# Altium PCB Main.PcbDoc
Units mm, origin at the board's own origin, x right, y up, seen from the top; angles counter-clockwise.
Board outline 197.87 x 96.77 mm, 2 copper layers (Top Layer, Bottom Layer); 50 components, 60 nets, 201 pads, 10 vias.
Unrouted connection lines stored in the file: 1.
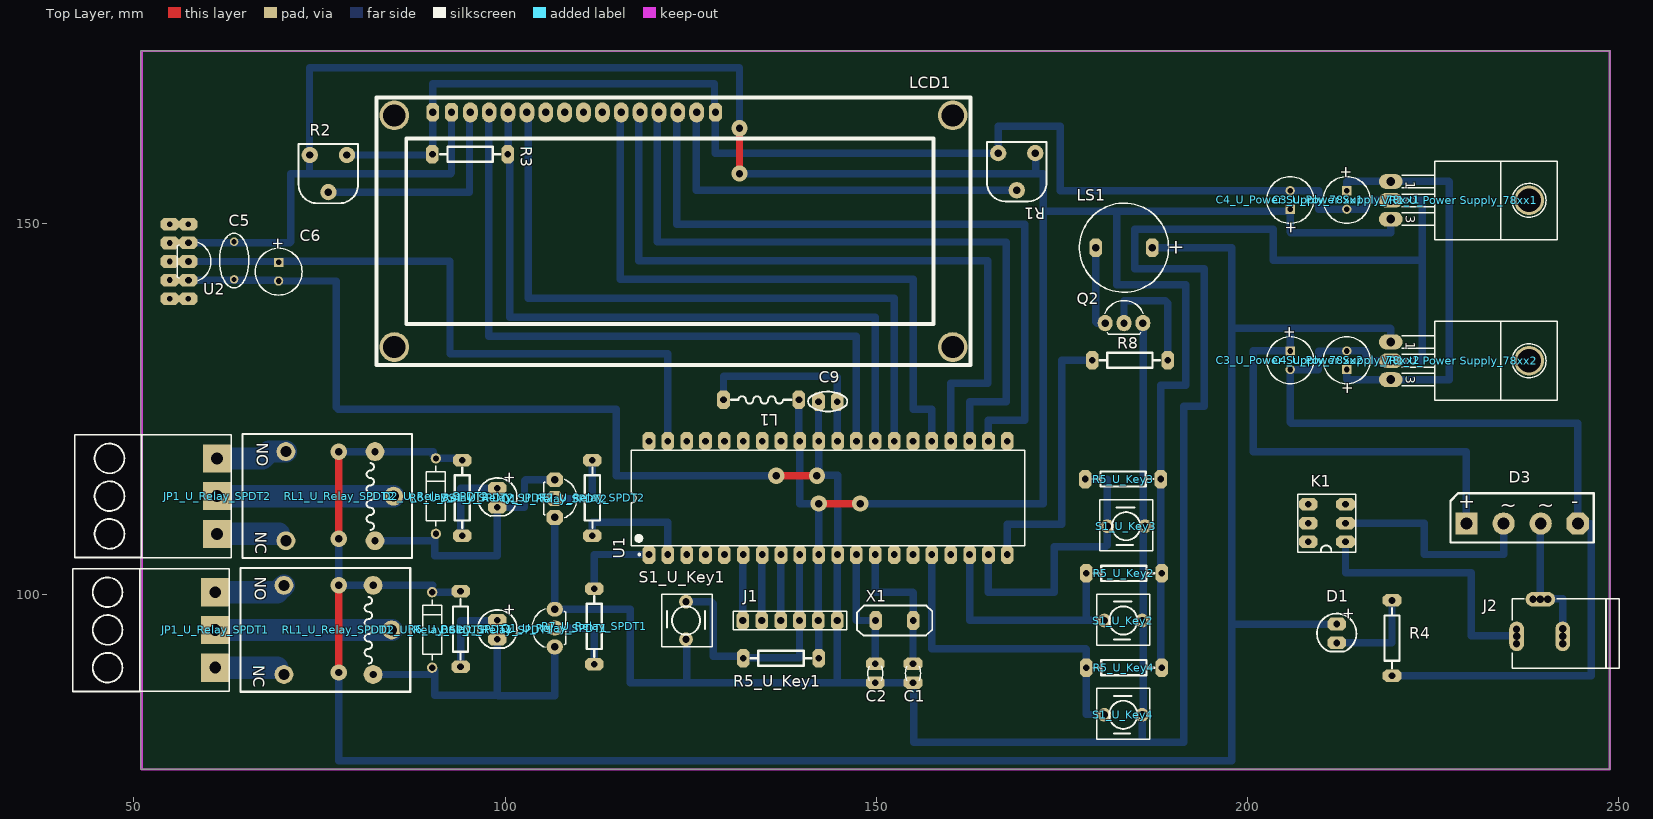
[diagram p0: Top Layer view]
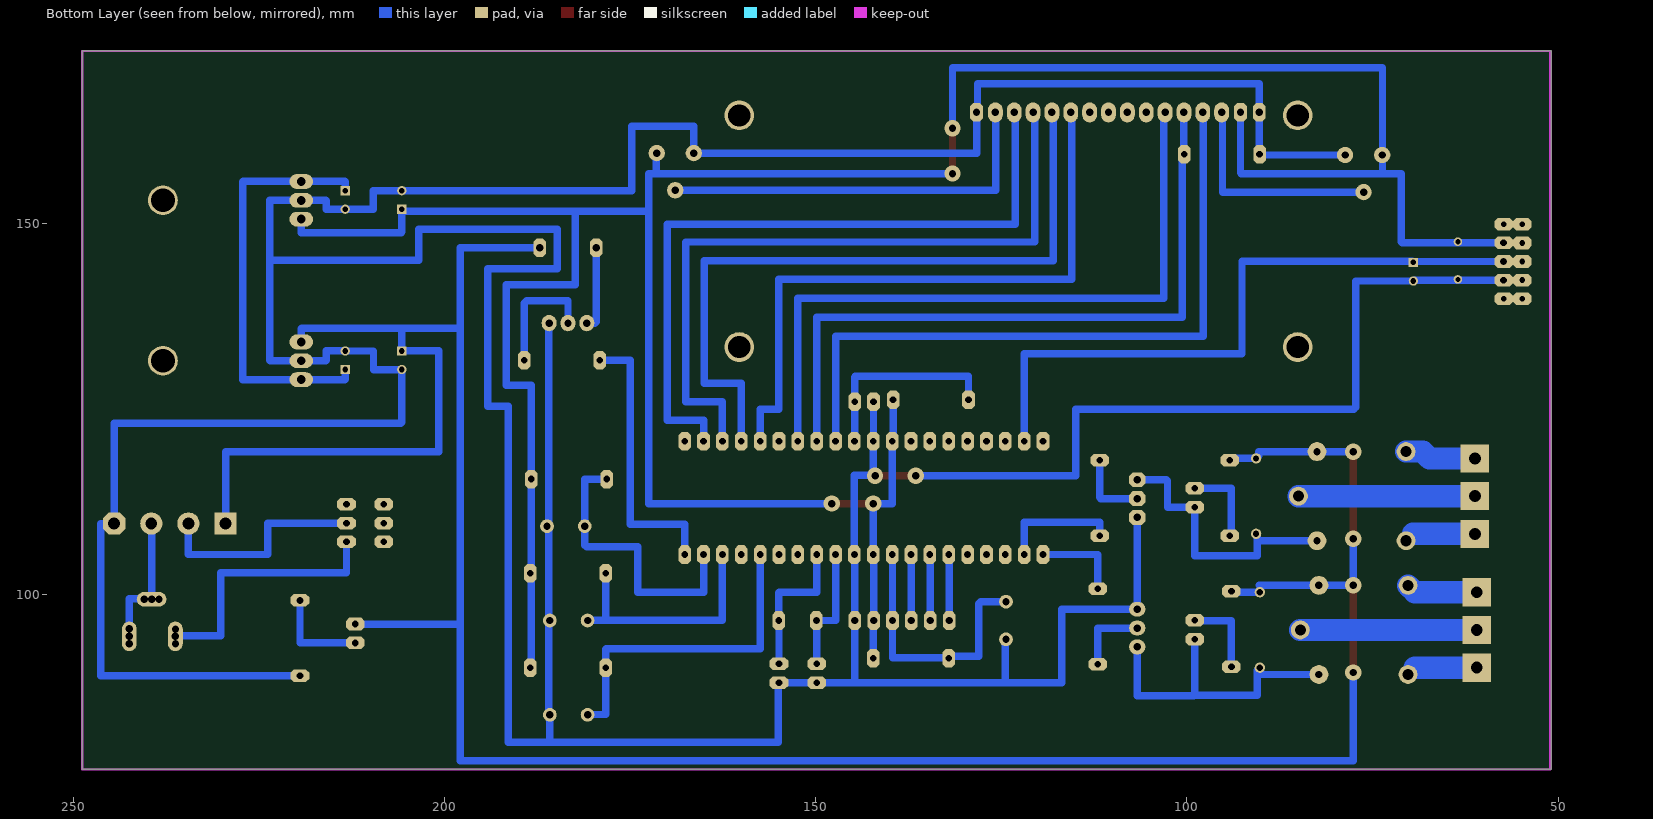
[diagram p1: Bottom Layer view, seen from below]
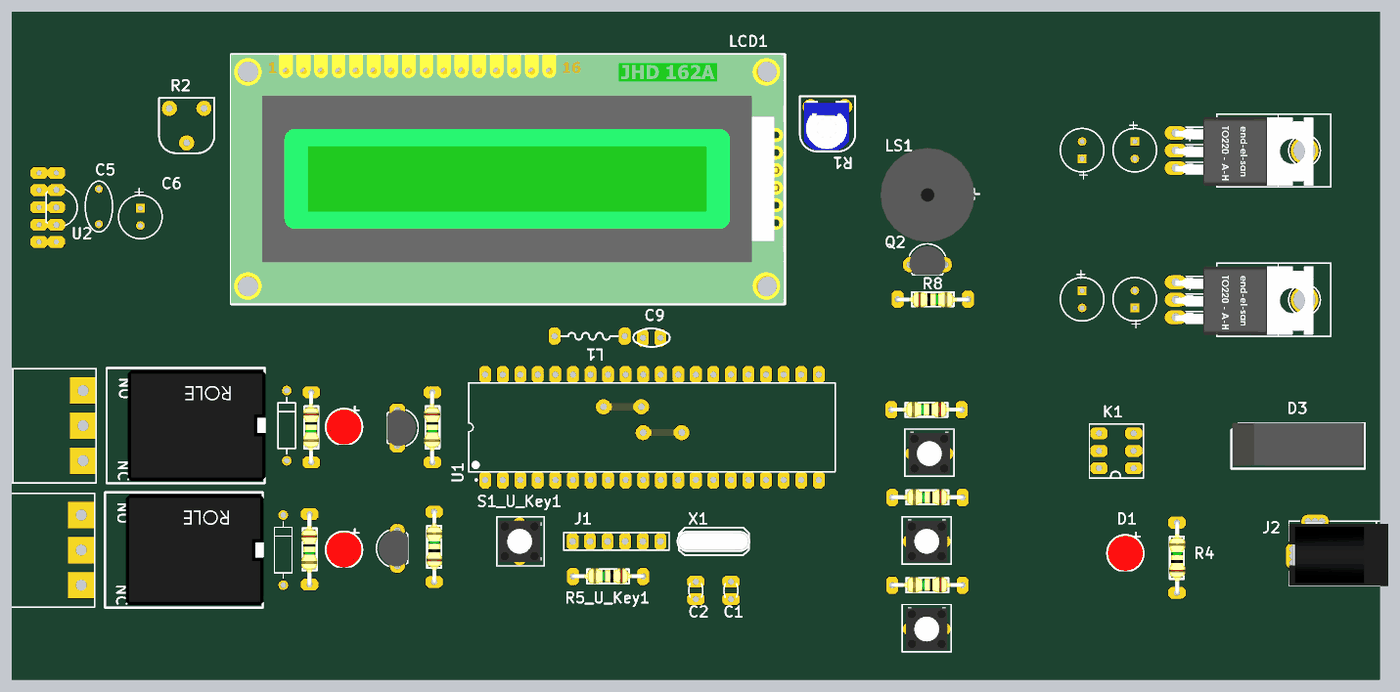
[diagram p2: 3D render of the assembled board from above, using the file's embedded part models]

## Layer stack, top to bottom
Top Solder: solder mask 0.0102, Solder Resist, Dk 3.5
Top Layer: signal copper 0.0356
Dielectric 1: dielectric 0.32, FR-4, Dk 4.8
Bottom Layer: signal copper 0.0356
Bottom Solder: solder mask 0.0102, Solder Resist, Dk 3.5

## Board outline
50.927,76.454 248.793,76.454 248.793,173.228 50.927,173.228

## Design rules (kind name [scope] priority, off if disabled: settings)
Clearance [All] p1: gap=0.5
Height [All] p1: minheight=0 maxheight=30 prefheight=12.7
PolygonConnect [All] p1: connectstyle=Relief reliefconductorwidth=0.254 reliefentries=4 polygonreliefangle="90 Angle" airgapwidth=0.254
RoomDefinition "U_Display_LED_Anode Command" [InComponentClass('U_Display_LED_Anode Command')] p1: confinementstyle=ConfineIn formatcopy=TRUE lockcomponents=FALSE outline 0,0 50.8,0 50.8,25.4 0,25.4
RoomDefinition U_Voltage_Bridge [InComponentClass('U_Voltage_Bridge')] p2: confinementstyle=ConfineIn formatcopy=TRUE lockcomponents=FALSE outline 0,0 50.8,0 50.8,25.4 0,25.4
RoomDefinition "U_Programer Connectors_SPI" [InComponentClass('U_Programer Connectors_SPI')] p3: confinementstyle=ConfineIn formatcopy=TRUE lockcomponents=FALSE outline 0,0 50.8,0 50.8,25.4 0,25.4
RoomDefinition U_Oscillator_11 [InComponentClass('U_Oscillator_11')] p4: confinementstyle=ConfineIn formatcopy=TRUE lockcomponents=FALSE outline 0,0 50.8,0 50.8,25.4 0,25.4
RoomDefinition U_Sensor_LM35 [InComponentClass('U_Sensor_LM35')] p5: confinementstyle=ConfineIn formatcopy=TRUE lockcomponents=FALSE outline 51.85,175.37 74.35,175.37 74.35,190.37 51.85,190.37
RoomDefinition U_Relay_SPDT2 [InComponentClass('U_Relay_SPDT2')] p6: confinementstyle=ConfineIn formatcopy=TRUE lockcomponents=FALSE outline 52.07,40.55 115.47,40.55 115.47,69.595 52.07,69.595
RoomDefinition U_AVCC [InComponentClass('U_AVCC')] p7: confinementstyle=ConfineIn formatcopy=TRUE lockcomponents=FALSE outline 143.51,60.96 134.62,60.96 134.62,44.45 143.51,44.45
RoomDefinition U_Relay_SPDT1 [InComponentClass('U_Relay_SPDT1')] p8: confinementstyle=ConfineIn formatcopy=TRUE lockcomponents=FALSE outline 53.34,10.16 116.84,10.16 116.84,38.354 53.34,38.354
RoomDefinition "U_Power Supply_78xx2" [InComponentClass('U_Power Supply_78xx2')] p9: confinementstyle=ConfineIn formatcopy=TRUE lockcomponents=FALSE outline 271.78,123.882 318.77,123.882 318.77,139.122 271.78,139.122
RoomDefinition "U_Power Supply_78xx1" [InComponentClass('U_Power Supply_78xx1')] p10: confinementstyle=ConfineIn formatcopy=TRUE lockcomponents=FALSE outline 271.78,142.952 318.77,142.952 318.77,157.176 271.78,157.176
RoomDefinition U_Key4 [InComponentClass('U_Key4')] p11: confinementstyle=ConfineIn formatcopy=TRUE lockcomponents=FALSE outline 228.6,12.7 259.08,12.7 259.08,27.94 228.6,27.94
RoomDefinition U_Key3 [InComponentClass('U_Key3')] p12: confinementstyle=ConfineIn formatcopy=TRUE lockcomponents=FALSE outline 228.6,49.53 256.54,49.53 256.54,66.04 228.6,66.04
RoomDefinition U_Key2 [InComponentClass('U_Key2')] p13: confinementstyle=ConfineIn formatcopy=TRUE lockcomponents=FALSE outline 228.6,30.48 257.81,30.48 257.81,46.99 228.6,46.99
RoomDefinition U_Key1 [InComponentClass('U_Key1')] p14: confinementstyle=ConfineIn formatcopy=TRUE lockcomponents=FALSE outline 131.445,13.97 163.195,13.97 163.195,34.29 131.445,34.29
RoomDefinition Sounder_Buzzer [InComponentClass('Sounder_Buzzer')] p15: confinementstyle=ConfineIn formatcopy=TRUE lockcomponents=FALSE outline 168.283,188.647 188.603,188.647 188.603,217.857 168.283,217.857
RoomDefinition Display_LCD16x2 [InComponentClass('Display_LCD16x2')] p16: confinementstyle=ConfineIn formatcopy=TRUE lockcomponents=FALSE outline 52.713,188.647 158.123,188.647 158.123,230.557 52.713,230.557
RoomDefinition ATmega16 [InComponentClass('ATmega16')] p17: confinementstyle=ConfineIn formatcopy=TRUE lockcomponents=FALSE outline 153.035,40.64 215.265,40.64 215.265,63.5 153.035,63.5
RoutingCorners [All] p1: cornerstyle=90-Degree minsetback=2.54 maxsetback=2.54
RoutingVias [All] p1: holewidth=0.8 width=1.6 viastyle="Through Hole" minholewidth=0.711 minwidth=1.27 maxholewidth=0.711 maxwidth=1.27
SolderMaskExpansion [All] p1: expansion=0.102
Width Width_1 [(InNet('NetJP1_U_Relay_SPDT1_1') OR InNet('NetJP1_U_Relay_SPDT1_2') OR InNet('NetJP1_U_Relay_SPDT1_3') OR InNet('NetJP1_U_Relay_SPDT2_1') OR InNet('NetJP1_U_Relay_SPDT2_2') OR InNet('NetJP1_U_Relay_SPDT2_3'))] p1: maxlimit=3 minlimit=3 preferedwidth=3
Width [All] p2: maxlimit=1 minlimit=1 preferedwidth=1
28 further rules are at their usual default settings.

## Classes and differential pairs
component class U_Sensor_LM35: C5 C6 U2
component class U_AVCC: C9 L1
component class ATmega16: U1
component class Display_LCD16x2: LCD1 R1 R2 R3
component class U_Oscillator_11: C1 C2 X1
component class U_Voltage_Bridge: D3 J2 K1
component class Sounder_Buzzer: LS1 Q2 R8
component class "U_Programer Connectors_SPI": J1
component class U_Key1: R5_U_Key1 S1_U_Key1
component class U_Key2: R5_U_Key2 S1_U_Key2
component class U_Key3: R5_U_Key3 S1_U_Key3
component class U_Key4: R5_U_Key4 S1_U_Key4
component class "U_Display_LED_Anode Command": D1 R4
component class "U_Power Supply_78xx1": "C3_U_Power Supply_78xx1" "C4_U_Power Supply_78xx1" "VR1_U_Power Supply_78xx1"
component class "U_Power Supply_78xx2": "C3_U_Power Supply_78xx2" "C4_U_Power Supply_78xx2" "VR1_U_Power Supply_78xx2"
component class U_Relay_SPDT1: D2_U_Relay_SPDT1 DS1_U_Relay_SPDT1 JP1_U_Relay_SPDT1 Q1_U_Relay_SPDT1 R6_U_Relay_SPDT1 R7_U_Relay_SPDT1 RL1_U_Relay_SPDT1
component class U_Relay_SPDT2: D2_U_Relay_SPDT2 DS1_U_Relay_SPDT2 JP1_U_Relay_SPDT2 Q1_U_Relay_SPDT2 R6_U_Relay_SPDT2 R7_U_Relay_SPDT2 RL1_U_Relay_SPDT2
channel class Key_Pull-Up: U_Key1 U_Key2 U_Key3 U_Key4
channel class Relay_SPDT: U_Relay_SPDT1 U_Relay_SPDT2
channel class "Voltage_Regulators_78xx_Figure 1": "U_Power Supply_78xx1" "U_Power Supply_78xx2"

## Components (designator, comment, footprint, x,y, rotation, side; value= is the part's Value field where it differs from the comment)
C1 "Cap" CAPNTO2.54-3.56x2.03 154.94,89.408 r90 top
C2 "Cap" CAPNTO2.54-3.56x2.03 149.86,89.408 r90 top
"C3_U_Power Supply_78xx1" "Cap Pol1" CAPPR2.5-6.3x5 213.36,153.162 r270 top (schematic designator C3)
"C3_U_Power Supply_78xx2" "Cap Pol1" CAPPR2.5-6.3x5 205.74,131.572 r270 top (schematic designator C3)
"C4_U_Power Supply_78xx1" "Cap Pol1" CAPPR2.5-6.3x5 205.74,153.162 r90 top (schematic designator C4)
"C4_U_Power Supply_78xx2" "Cap Pol1" CAPPR2.5-6.3x5 213.36,131.572 r90 top (schematic designator C4)
C5 "Cap" CAPNTO5.08-7.37x3.94 63.5,145 r90 top
C6 "Cap Pol1" CAPPR2.5-6.3x5 69.5,143.5 r270 top
C9 "Capacitor_2" RAD_2.54mm 143.51,125.984 r0 top
D1 "LED" LED-5mm_Red 212.09,94.742 r270 top
D2_U_Relay_SPDT1 "Diode" DIODE-0.4 90.17,95.25 r90 top (schematic designator D2)
D2_U_Relay_SPDT2 "Diode" DIODE-0.4 90.684,113.27 r90 top (schematic designator D2)
D3 "Bridge1" BRIDGE-2 236.979,109.582 r0 top
DS1_U_Relay_SPDT1 "LED" LED-5mm_Red 99.06,95.25 r270 top (schematic designator DS1)
DS1_U_Relay_SPDT2 "LED" LED-5mm_Red 99.06,113.03 r270 top (schematic designator DS1)
J1 "Connector_6pin" HDR1X6 138.43,96.52 r0 top
J2 "Power Jack" KLD-0202 242.44,94.382 r180 top
JP1_U_Relay_SPDT1 "Header 3" Fonics_3C 60.96,95.25 r270 top (schematic designator JP1)
JP1_U_Relay_SPDT2 "Header 3" Fonics_3C 61.22,113.27 r270 top (schematic designator JP1)
K1 "SW DPDT_2" DPDT-6_2 210.69,109.622 r270 top
L1 "Inductor" Inductor_Axial 134.874,126.238 r180 top
LCD1 "LCD_16*2" LCD_2x16 122.69,149.15 r0 top
LS1 "Buzzer" BUZZER 183.359,146.737 r180 top
Q1_U_Relay_SPDT1 "BC337" TO92C#1 106.68,95.504 r180 top (schematic designator Q1)
Q1_U_Relay_SPDT2 "BC337" TO92C#2 106.68,112.94 r0 top (schematic designator Q1)
Q2 "NPN" TO92C#1 183.359,136.577 r90 top
R1 "RPot1" VR8-5/5.6MM 168.91,156.972 r180 top
R2 "RPot1" VR8-5/5.6MM 76.2,156.718 r180 top
R3 "Res1" AXIAL-0.4 94.115,159.31 r0 top
R4 "Res1" AXIAL-0.4 219.456,92.964 r90 top
R5_U_Key1 "Res1" AXIAL-0.4 138.34,91.44 r180 top (schematic designator R5)
R5_U_Key2 "Res1" AXIAL-0.4 184.531,102.87 r180 top (schematic designator R5)
R5_U_Key3 "Res1" AXIAL-0.4 184.404,115.57 r180 top (schematic designator R5)
R5_U_Key4 "Res1" AXIAL-0.4 184.531,90.17 r180 top (schematic designator R5)
R6_U_Relay_SPDT1 "Res1" AXIAL-0.4 94,96.54 r270 top (schematic designator R6)
R6_U_Relay_SPDT2 "Res1" AXIAL-0.4 94.234,114.21 r270 top (schematic designator R6)
R7_U_Relay_SPDT1 "Res1" AXIAL-0.4 112,94.54 r90 top (schematic designator R7)
R7_U_Relay_SPDT2 "Res1" AXIAL-0.4 111.76,114.21 r270 top (schematic designator R7)
R8 "Res1" AXIAL-0.4 182.97,131.572 r0 top
RL1_U_Relay_SPDT1 "Relay-SPDT_2" RELAY-SPDT-1 77.47,95.25 r270 top (schematic designator RL1)
RL1_U_Relay_SPDT2 "Relay-SPDT_2" RELAY-SPDT-1 77.73,113.27 r270 top (schematic designator RL1)
S1_U_Key1 "SW-PB" SPST-2_2 124.37,96.52 r90 top (schematic designator S1)
S1_U_Key2 "SW-PB" SPST-2_2 183.261,96.52 r180 top (schematic designator S1)
S1_U_Key3 "SW-PB" SPST-2_2 183.642,109.22 r180 top (schematic designator S1)
S1_U_Key4 "SW-PB" SPST-2_2 183.261,83.82 r180 top (schematic designator S1)
U1 "ATmega16-16PC" 40P6 143.51,113.03 r90 top
U2 "LM35DZ" TO92C#3 57.35,144.87 r0 top
"VR1_U_Power Supply_78xx1" "Volt Reg" TO257H 228.6,153.112 r270 top (schematic designator VR1)
"VR1_U_Power Supply_78xx2" "Volt Reg" TO257H 228.6,131.502 r270 top (schematic designator VR1)
X1 "XTAL" XTAL_1 152.4,96.52 r0 top

## Footprints (in the part's own frame and the unit in brackets; to place one, negate y for a bottom-side part, rotate by r counter-clockwise, add the part's x,y. Pads: shape width x height; smd on the part's side, far side on the other; paste and mask are expansions set on the pad)
40P6 [mm] "DIP, 40-Leads, Row Spacing 15.24mm, Pitch 2.54mm, Body 52.2x13.95mm"
  oct 2.5x1.7 hole 0.9: 1(-7.62,24.13) 2(-7.62,21.59) 3(-7.62,19.05) 4(-7.62,16.51) 5(-7.62,13.97) 6(-7.62,11.43) 7(-7.62,8.89) 8(-7.62,6.35) 9(-7.62,3.81) 10(-7.62,1.27) 11(-7.62,-1.27) 12(-7.62,-3.81) 13(-7.62,-6.35) 14(-7.62,-8.89) 15(-7.62,-11.43) 16(-7.62,-13.97) 17(-7.62,-16.51) 18(-7.62,-19.05) 19(-7.62,-21.59) 20(-7.62,-24.13) 21(7.62,-24.13) 22(7.62,-21.59) 23(7.62,-19.05) 24(7.62,-16.51) 25(7.62,-13.97) 26(7.62,-11.43) 27(7.62,-8.89) 28(7.62,-6.35) 29(7.62,-3.81) 30(7.62,-1.27) 31(7.62,1.27) 32(7.62,3.81) 33(7.62,6.35) 34(7.62,8.89) 35(7.62,11.43) 36(7.62,13.97) 37(7.62,16.51) 38(7.62,19.05) 39(7.62,21.59) 40(7.62,24.13)
  silkscreen extent -7.74,-26.5 6.45,26.5, body extent -7.05,-26.47 7.05,26.47, height 4.83
AXIAL-0.4 [mm]
  oct 1.7x2.5 hole 0.9: 1(-3.9,0) 2(6.26,0)
  silkscreen extent -2.88,-1.02 5.24,1.02, body extent -4.19,-1.19 6.58,1.12, height 3.51
BRIDGE-2 [mm]
  oct 3x3 hole 1.6: 1(7.5,0)
  round 3 hole 1.6: 2(-2.5,0) 4(2.5,0)
  rect 3x3 hole 1.6: 3(-7.5,0)
  silkscreen extent -9.65,-2.54 9.65,4.06, body extent -9.5,-2.12 9.5,4.13, height 15.75
BUZZER [mm] "created by: M.Hariri (designer)"
  oct 1.7x2.5 hole 1: 1(-3.81,0) 2(3.81,0)
  silkscreen extent -6,-6 6,6, body extent -6.88,-6.78 6.82,6.9, height 9.59
CAPNTO2.54-3.56x2.03 [mm] "Capacitor, Radial, Tantalum, Non-Polarised; Body 3.56 x 2.03 x 5.08 mm (WxTxH max); Pin Spacing 2.54 mm (typ)"
  oct 1.7x2.5 hole 0.9: 1(-1.27,0) 2(1.27,0)
  silkscreen extent -0.98,-1.02 0.98,1.02
CAPNTO5.08-7.37x3.94 [mm] "Capacitor, Radial, Tantalum, Non-Polarised; Body 7.37 x 3.94 x 6.86 mm (WxTxH max); Pin Spacing 5.08 mm (typ)"
  round 1.15 hole 0.7: 1(-2.54,0) 2(2.54,0)
  silkscreen extent -3.68,-1.98 3.68,1.96
CAPPR2.5-6.3x5 [mm] "Capacitor, Electrolytic, Radial; Body 6.3 x 5 mm (Dia.xH typ); Pin Spacing 2.5 mm (typ)"
  rect 1.25x1.25 hole 0.75: 1(-1.25,0)
  round 1.25 hole 0.75: 2(1.25,0)
  silkscreen extent -3.15,-3.15 3.15,3.15
DIODE-0.4 [mm]
  round 1.4 hole 0.85: 1(-5.08,0) 2(5.08,0)
  silkscreen extent -4.06,-1.27 4.06,1.27
DPDT-6_2 [mm]
  oct 1.7x2.5 hole 0.9: 1(-2.54,2.5) 2(0,2.5) 3(2.5,2.5) 4(2.5,-2.5) 5(0,-2.5) 6(-2.54,-2.5)
  silkscreen extent -3.9,-3.9 3.94,3.9
Fonics_3C [mm]
  rect 3.8x3.8 hole 1.6: 1(-5.08,0) 2(0,0) 3(5.08,0)
  silkscreen extent -8.24,-19.16 8.29,1.91
HDR1X6 [mm]
  oct 1.7x2.5 hole 1: 1(-6.4,0) 2(-3.86,0) 3(-1.32,0) 4(1.22,0) 5(3.76,0) 6(6.3,0)
  silkscreen extent -7.67,-1.27 7.57,1.27
Inductor_Axial [mm]
  oct 1.7x2.5 hole 0.9: 1(-4.7,0) 2(5.46,0)
  silkscreen extent -3.68,-0.48 4.44,0.51
KLD-0202 [mm]
  oval 2x4 all layers, no hole: 1(6.2,0) 2(0,0)
  round 1.5 hole 1: 1A(6.22,-0.98) 1B(6.2,0) 1C(6.22,1) 2A(0,-1) 2B(0,0.01) 2C(0,1) 3A(2,-5) 3B(3,-5) 3C(4,-5)
  oval 4x2 all layers, no hole: 3(3,-5)
  silkscreen extent -7.59,-5.05 6.78,4.28, body extent -7.59,-5.07 6.81,4.33, height 11.05
LCD_2x16 [mm]
  round 4 hole 3: 0(-37.6,-15.8) 0(-37.6,15.4) 0(37.6,-15.8) 0(37.6,15.4)
  oct 1.7x2.5 hole 1: 1(-32.45,15.8) 2(-29.91,15.8) 16(5.65,15.8)
  oval 2x2.7 hole 1: 3(-27.37,15.8) 4(-24.83,15.8) 5(-22.29,15.8) 6(-19.75,15.8) 7(-17.21,15.8) 8(-14.67,15.8) 9(-12.13,15.8) 10(-9.59,15.8) 11(-7.05,15.8) 12(-4.51,15.8) 13(-1.97,15.8) 14(0.57,15.8) 15(3.11,15.8)
  silkscreen extent -40,-18.2 40,17.8, body extent -40.13,-18.15 39.87,17.85, height 25.6
LED-5mm_Red [mm]
  oct 1.7x2.5 hole 0.9: 1(-1.3,-0.1) 2(1.24,-0.1)
  silkscreen extent -2.71,-2.74 2.43,2.56, body extent -2.6,-2.64 2.48,2.46, height 9.6
RAD_2.54mm [mm]
  oct 1.7x2.5 hole 0.9: 1(-1.3,0) 2(1.24,0)
  silkscreen extent -2.7,-1.31 2.58,1.37
RELAY-SPDT-1 [mm]
  round 2.54 hole 1.5: 1(0,7.25) 2(-6,-7.25) 3(6,-7.25)
  round 2.54 hole 1: 4(-6,4.75) 5(6,4.75)
  silkscreen extent -8.36,-13.09 8.33,9.75, body extent -8.02,-10.1 7.98,9.9, height 15.58
SPST-2_2 [mm]
  round 1.85 hole 1: 1(-2.54,0) 2(2.54,0)
  silkscreen extent -3.56,-3.56 3.56,3.3, body extent -3,-3.2 3,3, height 4.3
TO92C#1 [mm]
  oval 2.2x2 hole 1: 1(0,2.54) 2(0,0) 3(0,-2.54)
  silkscreen extent -1.48,-2.61 3.02,2.61, body extent -1.52,-2.79 2.68,2.79, height 8
TO92C#2 [mm]
  oct 2.2x2 hole 1: 1(0,2.54) 2(0,0) 3(0,-2.54)
  silkscreen extent -1.48,-2.61 3.02,2.61, body extent -1.52,-2.79 2.68,2.79, height 8
TO92C#3 [mm]
  oct 2.5x1.7 hole 0.9: 1(0,2.54) 2(0,0) 3(0,-2.54)
  silkscreen extent -1.48,-2.61 3.02,2.61
TO257H [mm] "created by designer (M.Hariri)"
  round 4 hole 3.2: 0(0,9.313)
  oval 2x3.2 hole 1.2: 1(-2.54,-9.313) 2(0,-9.313) 3(2.54,-9.313)
  silkscreen extent -5.29,-7.83 5.29,13.12, body extent -4.83,-9.6 5.07,10.61, height 4.55
VR8-5/5.6MM [mm]
  round 2.2 hole 1: 1(-2.5,-2.5) 2(2.5,-2.5) 3(0,2.5)
  silkscreen extent -4,-4 4,4, body extent -3.13,-3.35 3.37,3.89, height 7.7
XTAL_1 [mm]
  oct 1.7x2.5 hole 0.9: 1(-2.5,0) 2(2.58,0)
  silkscreen extent -5.02,-2 5.13,2, body extent -5.33,-1.52 5.33,1.52, height 3.39

## Part data
C1 C2 C5 C9: "Capacitor"
"C3_U_Power Supply_78xx1" "C3_U_Power Supply_78xx2" "C4_U_Power Supply_78xx1" "C4_U_Power Supply_78xx2" C6: "Polarized Capacitor (Radial)"
D1 DS1_U_Relay_SPDT1 DS1_U_Relay_SPDT2: "Typical INFRARED GaAs LED"
D2_U_Relay_SPDT1 D2_U_Relay_SPDT2: "Default Diode"
D3: "Full Wave Diode Bridge"
J1: "Header, 6-Pin"
JP1_U_Relay_SPDT1 JP1_U_Relay_SPDT2: "Header, 3-Pin"
K1: "Single-Pole, Double-Throw Switch, Key"
Q1_U_Relay_SPDT1 Q1_U_Relay_SPDT2: library part NPN, "NPN Bipolar Transistor"
Q2: "NPN Bipolar Transistor"
R1 R2: "Potentiometer"
R3 R4 R5_U_Key1 R5_U_Key2 R5_U_Key3 R5_U_Key4 R6_U_Relay_SPDT1 R6_U_Relay_SPDT2 R7_U_Relay_SPDT1 R7_U_Relay_SPDT2 R8: "Resistor"
RL1_U_Relay_SPDT1 RL1_U_Relay_SPDT2: "SPDT Relay"
S1_U_Key1 S1_U_Key2 S1_U_Key3 S1_U_Key4: "Switch"
U1: "8-Bit AVR Microcontroller with 16K Bytes of In-System Programmable Flash Memory"
U2: "Precision Centigrade Temperature Sensor, 3-pin TO-92"
"VR1_U_Power Supply_78xx1" "VR1_U_Power Supply_78xx2": "Voltage Regulator"
X1: "Crystal Oscillator"

## Free pads (board coordinates)
  oct 2.5x1.7 hole 0.762: 0(54.85,147.37) 2(54.85,144.87) 4(54.85,142.37) 5(54.85,139.87) 6(54.85,149.87) 7(57.35,139.87) 8(57.35,149.87)

## Via types
v1: diameter 2.2, hole 1, Top Layer to Bottom Layer, 10 vias

## Nets (pads, with @x,y where several pads share a name; then routed paths per layer and width w, separated by ;. In a path a pad name is that pad's centre, name@x,y a point inside that pad or via, vN(x,y) a via of type N, cw(c..) or ccw(c..) an arc to the next point about the centre after c; other vN are vias at no path point)
ADC0: U1.40
ADC2: U1.38
ADC3: U1.37
ADC4: U1.36
ADC5: U1.35
ADC6: U1.34
ADC7: U1.33
GND: "C3_U_Power Supply_78xx1.2" "C3_U_Power Supply_78xx2.2" "C4_U_Power Supply_78xx1.2" "C4_U_Power Supply_78xx2.2" "VR1_U_Power Supply_78xx1.2" "VR1_U_Power Supply_78xx2.2" C1.1 C2.1 C5.1 C6.2 C9.1 D3.1 J1.6 LCD1.1 LCD1.16 Q1_U_Relay_SPDT1.3 Q1_U_Relay_SPDT2.3 Q2.3 R1.2 R2.1 R3.1 R4.1 S1_U_Key1.1 S1_U_Key2.1 S1_U_Key3.1 S1_U_Key4.1 U1.11 U1.31 U2.3 | length 783
  Top Layer w1: v1(136.5,116) v1(142,116)
  Bottom Layer w1: U2.3 C6.2@69.42,142.33 ; C6.2 77.25,142.25 77.25,125.25 77.5,125 115,125 115,116 v1(136.5,116) ; R2.1 R3.1@90.123,159.218 ; R3.1@90.24,159.335 LCD1.1 90.24,168.84 128.2,168.84 LCD1.16@128.2,165.09 ; Q1_U_Relay_SPDT2.3 Q1_U_Relay_SPDT1.3 116.84,98.044 116.84,88.138 124.46,88.138 ; S1_U_Key1.1@124.46,93.89 124.46,88.138 ; LCD1.16@128.31,164.92 128.31,159.472 R1.2 166.41,163.068 174.772,163.068 174.772,154.412 205.74,154.412 209.57,154.412 209.57,151.912 213.36,151.912 213.38,151.892 215.9,151.892 215.9,153.062 215.95,153.112 219.287,153.112 223.52,153.112 223.52,145.034 ; U1.31@142.21,120.68 C9.1 ; U1.31 142.24,116.078 144.78,116.078 U1.11 ; 144.73,88.188 J1.6 U1.11@144.73,105.36 ; C1.1 C2.1 124.46,88.138 ; C1.1@155.067,88.011 155.067,80.137 185.801,80.137 ; S1_U_Key4.1 185.801,80.137 ; S1_U_Key4.1@185.936,83.82 Q2.3@185.936,136.577 ; 205.74,130.322 205.74,123.19 205.871,123.059 244.479,123.059 D3.1 246.272,109.582 246.29,109.564 246.29,89.064 R4.1 ; 205.76,130.302 209.55,130.302 209.55,132.802 209.57,132.822 213.36,132.822 ; 213.38,132.842 215.9,132.842 215.9,131.572 215.97,131.502 219.287,131.502 223.45,131.502 223.52,131.572 223.52,145.034 ; 185.801,80.137 191.389,80.137 191.389,125.349 194.183,125.349 194.183,143.891 184.785,143.891 184.785,149.225 203.454,149.225 203.454,145.034 223.52,145.034
NetC1_2: C1.2 U1.13 X1.2 | length 19.8
  Bottom Layer w1: U1.13 149.86,100.33 154.94,100.33 154.98,100.29 X1.2 ; X1.2@154.94,96.48 C1.2 C1.2@154.98,90.718
NetC2_2: C2.2 U1.12 X1.1 | length 17.3
  Bottom Layer w1: U1.12 147.32,96.52 X1.1 ; C2.2 X1.1@149.86,96.48
"NetC3_U_Power Supply_78xx1_1": "C3_U_Power Supply_78xx1.1" "C4_U_Power Supply_78xx2.1" "VR1_U_Power Supply_78xx1.1" "VR1_U_Power Supply_78xx2.3" | length 56.8
  Bottom Layer w1: 213.36,130.322 213.36,129.032 213.43,128.962 219.287,128.962 227.146,128.962 227.146,155.632 227.126,155.652 219.287,155.652 213.41,155.652 213.36,155.602 213.36,154.412
NetC9_2: C9.2 L1.2 U1.30 | length 27.2
  Bottom Layer w1: L1.2 129.414,129.412 144.652,129.412 144.75,129.314 C9.2 U1.30@144.75,120.68
NetD1_2: D1.2 R4.2 | length 13.2
  Bottom Layer w1: D1.2 219.426,93.502 219.456,93.532 R4.2
NetD2_U_Relay_SPDT1_1: D2_U_Relay_SPDT1.1 DS1_U_Relay_SPDT1.2 Q1_U_Relay_SPDT1.1 RL1_U_Relay_SPDT1.5 | length 42.4
  Bottom Layer w1: RL1_U_Relay_SPDT1.5 90.266,89.25 D2_U_Relay_SPDT1.1@90.266,90.074 ; D2_U_Relay_SPDT1.1@90.524,89.816 90.524,86.46 98.96,86.46 DS1_U_Relay_SPDT1.2 ; 99.06,86.36 106.68,86.36 Q1_U_Relay_SPDT1.1
NetD2_U_Relay_SPDT2_1: D2_U_Relay_SPDT2.1 DS1_U_Relay_SPDT2.2 Q1_U_Relay_SPDT2.1 RL1_U_Relay_SPDT2.5 | length 37.2
  Bottom Layer w1: RL1_U_Relay_SPDT2.5 90.342,107.27 90.524,107.452 ; D2_U_Relay_SPDT2.1@90.524,108.03 90.524,107.452 ; Q1_U_Relay_SPDT2.1 102.78,115.48 102.616,115.316 102.616,111.82 102.586,111.79 DS1_U_Relay_SPDT2.2 98.96,105.256 90.524,105.256 90.524,107.452
NetD3_2: D3.2 K1.2 | length 29.7
  Bottom Layer w1: K1.2 223.774,109.622 223.774,105.41 234.479,105.41 D3.2
NetD3_4: D3.4 J2.2 J2.3 | length 10.2
  Bottom Layer w1: J2.3 D3.4@239.44,109.543
NetDS1_U_Relay_SPDT1_1: DS1_U_Relay_SPDT1.1 R6_U_Relay_SPDT1.2 | length 11.1
  Bottom Layer w1: R6_U_Relay_SPDT1.2 94,96.5 DS1_U_Relay_SPDT1.1@98.91,96.5
NetDS1_U_Relay_SPDT2_1: DS1_U_Relay_SPDT2.1 R6_U_Relay_SPDT2.2 | length 11.1
  Bottom Layer w1: R6_U_Relay_SPDT2.2@94.01,108.174 94.01,114.33 DS1_U_Relay_SPDT2.1
NetJ1_4: J1.4 R5_U_Key1.2 S1_U_Key1.2 U1.9 | length 36.5
  Bottom Layer w1: S1_U_Key1.2 127.762,99.06 128.016,98.806 128.016,91.694 131.826,91.694 R5_U_Key1.2 132.13,91.49 139.65,91.49 J1.4 U1.9@139.65,105.36
NetJ2_1: J2.1 K1.3 | length 35.9
  Bottom Layer w1: K1.3 213.19,102.954 230.124,102.954 230.124,94.488 J2.1@236.474,94.488
NetJP1_U_Relay_SPDT1_1: JP1_U_Relay_SPDT1.1 RL1_U_Relay_SPDT1.2 | length 9.6
  Bottom Layer w3: JP1_U_Relay_SPDT1.1 69.3,100.33 RL1_U_Relay_SPDT1.2
NetJP1_U_Relay_SPDT1_2: JP1_U_Relay_SPDT1.2 RL1_U_Relay_SPDT1.1 | length 23.8
  Bottom Layer w3: JP1_U_Relay_SPDT1.2 RL1_U_Relay_SPDT1.1
NetJP1_U_Relay_SPDT1_3: JP1_U_Relay_SPDT1.3 RL1_U_Relay_SPDT1.3 | length 8.3
  Bottom Layer w3: JP1_U_Relay_SPDT1.3 69.3,90.17
NetJP1_U_Relay_SPDT2_1: JP1_U_Relay_SPDT2.1 RL1_U_Relay_SPDT2.2 | length 9.6
  Bottom Layer w3: JP1_U_Relay_SPDT2.1 67.33,118.35 68.25,119.27 RL1_U_Relay_SPDT2.2
NetJP1_U_Relay_SPDT2_2: JP1_U_Relay_SPDT2.2 RL1_U_Relay_SPDT2.1 | length 23.8
  Bottom Layer w3: JP1_U_Relay_SPDT2.2 RL1_U_Relay_SPDT2.1
NetJP1_U_Relay_SPDT2_3: JP1_U_Relay_SPDT2.3 RL1_U_Relay_SPDT2.3 | length 8.3
  Bottom Layer w3: JP1_U_Relay_SPDT2.3 69.56,108.19
NetLCD1_3: LCD1.3 R2.3 | length 29.6
  Bottom Layer w1: R2.3 95.21,154.218 LCD1.3@95.21,164.84
NetLCD1_4: LCD1.4 U1.29 | length 93.6
  Bottom Layer w1: LCD1.4@98.32,164.49 97.79,163.96 97.79,134.82 147.32,134.82 U1.29
NetLCD1_5: LCD1.5 R3.2 U1.28 | length 93.2
  Bottom Layer w1: R3.2@100.4,159.335 LCD1.5 ; R3.2@100.64,159.045 100.64,137.36 149.86,137.36 U1.28
NetLCD1_6: LCD1.6 U1.27 | length 93.4
  Bottom Layer w1: LCD1.6@103.1,164.79 103.1,139.9 152.4,139.9 U1.27
NetLCD1_11: LCD1.11 U1.25 | length 86.1
  Bottom Layer w1: LCD1.11@115.5,164.81 115.5,142.5 155,142.5 155,125 157.46,125 157.48,124.98 U1.25
NetLCD1_12: LCD1.12 U1.24 | length 96.1
  Bottom Layer w1: LCD1.12@118,164.77 118,145 165,145 165,128.5 160.02,128.5 U1.24
NetLCD1_13: LCD1.13 U1.23 | length 96
  Bottom Layer w1: LCD1.13@120.5,164.73 120.5,147.5 167.5,147.5 167.5,126 165.641,126 165.621,125.98 162.56,125.98 U1.23
NetLCD1_14: LCD1.14 U1.22 | length 95.9
  Bottom Layer w1: LCD1.14@123.1,164.79 123.1,149.9 170,149.9 170,123.5 165.1,123.5 U1.22
NetLCD1_15: LCD1.15 R1.3 | length 53.6
  Bottom Layer w1: LCD1.15@125.77,164.92 125.77,154.472 R1.3
NetLS1_2: LS1.2 Q2.1 | length 11.3
  Bottom Layer w1: LS1.2 179.549,136.771 179.743,136.577 Q2.1
NetQ1_U_Relay_SPDT1_2: Q1_U_Relay_SPDT1.2 R7_U_Relay_SPDT1.1 | length 10.2
  Bottom Layer w1: Q1_U_Relay_SPDT1.2 112.014,95.504 112,95.49 R7_U_Relay_SPDT1.1
NetQ1_U_Relay_SPDT2_2: Q1_U_Relay_SPDT2.2 R7_U_Relay_SPDT2.1 | length 10.2
  Bottom Layer w1: Q1_U_Relay_SPDT2.2 111.596,112.94 111.76,113.104 R7_U_Relay_SPDT2.1
NetQ2_2: Q2.2 R8.2 | length 16.7
  Bottom Layer w1: Q2.2 183.359,139.581 188.931,139.581 189.23,139.282 R8.2
NetR5_U_Key2_2: R5_U_Key2.2 S1_U_Key2.2 U1.18 | length 33.2
  Bottom Layer w1: U1.18@162.597,105.373 162.597,96.557 178.271,96.557 ; R5_U_Key2.2 178.271,96.557 ; S1_U_Key2.2@180.684,96.557 178.271,96.557
NetR5_U_Key3_2: R5_U_Key3.2 S1_U_Key3.2 U1.19 | length 39.1
  Bottom Layer w1: U1.19 165.1,100.33 173.99,100.33 173.99,106.426 180.848,106.426 181.102,106.68 S1_U_Key3.2 181.102,115.57 R5_U_Key3.2
NetR5_U_Key4_2: R5_U_Key4.2 S1_U_Key4.2 U1.16 | length 44.7
  Bottom Layer w1: U1.16 157.48,92.71 178.234,92.71 178.271,92.673 R5_U_Key4.2 178.271,83.857 S1_U_Key4.2@180.684,83.857
NetR7_U_Relay_SPDT1_2: R7_U_Relay_SPDT1.2 U1.1 | length 12
  Bottom Layer w1: R7_U_Relay_SPDT1.2 112,105.396 112.014,105.41 U1.1
NetR7_U_Relay_SPDT2_2: R7_U_Relay_SPDT2.2 U1.2 | length 16.3
  Bottom Layer w1: R7_U_Relay_SPDT2.2 111.76,109.728 121.92,109.728 U1.2
NetR8_1: R8.1 U1.20 | length 37.6
  Bottom Layer w1: U1.20 167.64,109.474 175,109.474 175,131.572 R8.1
PA1: C6.1 U1.39 U2.2 | length 88.6
  Bottom Layer w1: U2.2 C6.1@69.38,144.87 ; C6.1@69.67,144.92 92.58,144.92 92.58,132.42 121.92,132.42 U1.39
PB2: U1.3
PB3: U1.4
PB4: U1.5
PB5: J1.1 U1.6 | length 8.8
  Bottom Layer w1: J1.1 U1.6@132.03,105.36
PB6: J1.2 U1.7 | length 8.8
  Bottom Layer w1: J1.2 U1.7@134.57,105.36
PB7: J1.3 U1.8 | length 8.8
  Bottom Layer w1: J1.3 U1.8@137.11,105.36
PC4: U1.26
PD0: U1.14
PD1: U1.15
PD3: U1.17
PD7: U1.21
VCC: "C4_U_Power Supply_78xx1.1" "VR1_U_Power Supply_78xx1.3" C5.2 J1.5 L1.1 LCD1.2 R1.1 R2.2 R5_U_Key1.1 R5_U_Key2.1 R5_U_Key3.1 R5_U_Key4.1 U1.10 U1.32 U2.1 | length 420.1
  Top Layer w1: v1(131.572,156.718) v1(131.572,162.814) ; v1(142.24,112.268) v1(147.828,112.268)
  Bottom Layer w1: U2.1 71.03,147.41 71.12,147.5 71.12,156.718 73.66,156.718 ; R2.2@73.66,159.178 73.66,156.718 ; R2.2@73.66,159.218 73.66,170.942 131.572,170.942 v1(131.572,162.814) ; LCD1.2 92.78,156.788 92.71,156.718 73.66,156.718 ; v1(131.572,156.718) 171.45,156.718 ; U1.32@139.574,120.776 L1.1 ; U1.32 139.7,112.268 v1(142.24,112.268) U1.10 ; J1.5 U1.10@142.19,105.36 ; R5_U_Key1.1 J1.5@142.24,96.47 ; v1(147.828,112.268) 172.466,112.268 172.466,151.638 ; R1.1@171.45,159.432 171.45,156.718 ; R5_U_Key4.1@188.304,90.297 188.304,128.18 191.68,128.18 191.68,141.732 182.372,141.732 182.372,151.638 ; 205.466,151.638 182.372,151.638 ; 205.74,151.912 205.74,148.844 205.825,148.759 219.287,148.759 219.287,150.572 ; 171.45,156.718 172.466,156.718 172.466,151.638 ; 172.466,151.638 182.372,151.638
VDD: "C3_U_Power Supply_78xx2.1" "VR1_U_Power Supply_78xx2.1" D1.1 D2_U_Relay_SPDT1.2 D2_U_Relay_SPDT2.2 D3.3 LS1.1 R6_U_Relay_SPDT1.1 R6_U_Relay_SPDT2.1 RL1_U_Relay_SPDT1.4 RL1_U_Relay_SPDT2.4 | length 372.1
  Top Layer w1: v1(77.58,89.518) v1(77.58,101.25) ; v1(77.58,107.552) v1(77.58,119.27)
  Bottom Layer w1: v1(77.58,89.518) 77.58,77.614 77.59,77.604 197.866,77.604 197.866,135.89 205.74,135.89 ; v1(77.58,107.552) v1(77.58,101.25) RL1_U_Relay_SPDT1.4 90.266,101.25 90.17,101.154 ; v1(77.58,119.27) RL1_U_Relay_SPDT2.4 90.314,119.27 D2_U_Relay_SPDT2.2@90.314,118.72 ; D2_U_Relay_SPDT1.2 93.89,100.33 R6_U_Relay_SPDT1.1 ; D2_U_Relay_SPDT2.2 R6_U_Relay_SPDT2.1@93.994,118.35 ; LS1.1 197.866,146.737 197.866,136.144 ; 197.866,96.042 D1.1 ; 205.74,132.822 205.74,132.842 ; 219.287,134.042 219.287,135.805 219.202,135.89 205.74,135.89 ; D3.3 229.479,119.263 200.777,119.263 200.777,132.842 205.74,132.842 ; 205.74,132.842 205.74,135.89
pads on no net: "VR1_U_Power Supply_78xx1.0" "VR1_U_Power Supply_78xx2.0" J2.1A J2.1B J2.1C J2.2A J2.2B J2.2C J2.3A J2.3B J2.3C K1.1 K1.4 K1.5 K1.6 LCD1.0 LCD1.7 LCD1.8 LCD1.9 LCD1.10
copper on no net: | length 8
  Bottom Layer w1: 239.498,99.44 242.44,99.44 242.44,94.372

## Keep-outs
Keep-Out Layer:
  lines w0.3: 51.054,76.454 248.793,76.454 248.793,173.228 51.054,173.228 51.054,76.454

## Dimensions
51.054,76.454 to 248.793,76.454 on Mechanical 1
51.054,76.454 to 51.054,173.228 on Mechanical 1

## Text inside footprints (layer, text, board x,y; h text height)
"C3_U_Power Supply_78xx1": Top Overlay "+" at 212.61,157.787 h1.5 r270
"C3_U_Power Supply_78xx2": Top Overlay "+" at 204.99,136.197 h1.5 r270
"C4_U_Power Supply_78xx1": Top Overlay "+" at 206.49,148.537 h1.5 r90
"C4_U_Power Supply_78xx2": Top Overlay "+" at 214.11,126.947 h1.5 r90
C6: Top Overlay "+" at 68.75,148.125 h1.5 r270
D1: Top Overlay "+" at 212.955,98.328 h1.52 r270
D3: Top Overlay "~" at 233.931,111.106 h2; Top Overlay "~" at 239.011,111.106 h2; Top Overlay "+" at 228.343,111.614 h2; Top Overlay "-" at 243.583,111.614 h2
DS1_U_Relay_SPDT1: Top Overlay "+" at 99.925,98.836 h1.52 r270
DS1_U_Relay_SPDT2: Top Overlay "+" at 99.925,116.616 h1.52 r270
LS1: Top Overlay "+" at 191.512,147.575 h2 r180
RL1_U_Relay_SPDT1: Top Overlay "NC" at 66.091,90.475 h1.52 r270; Top Overlay "NO" at 66.269,102.438 h1.52 r270
RL1_U_Relay_SPDT2: Top Overlay "NC" at 66.351,108.495 h1.52 r270; Top Overlay "NO" at 66.529,120.458 h1.52 r270
"VR1_U_Power Supply_78xx1": Top Overlay "1" at 221.319,155.652 h1.27 r270; Top Overlay "2" at 221.319,153.62 h1.27 r270; Top Overlay "3" at 221.319,151.08 h1.27 r270
"VR1_U_Power Supply_78xx2": Top Overlay "1" at 221.319,134.042 h1.27 r270; Top Overlay "2" at 221.319,132.01 h1.27 r270; Top Overlay "3" at 221.319,129.47 h1.27 r270